# Altium PCB MainBoard.PcbDoc
Units mil, origin at the board's own origin, x right, y up, seen from the top; angles counter-clockwise.
Board outline 2255 x 2075 mil, 2 copper layers (Top Layer, Bottom Layer); 20 components, 27 nets, 97 pads, 4 vias.
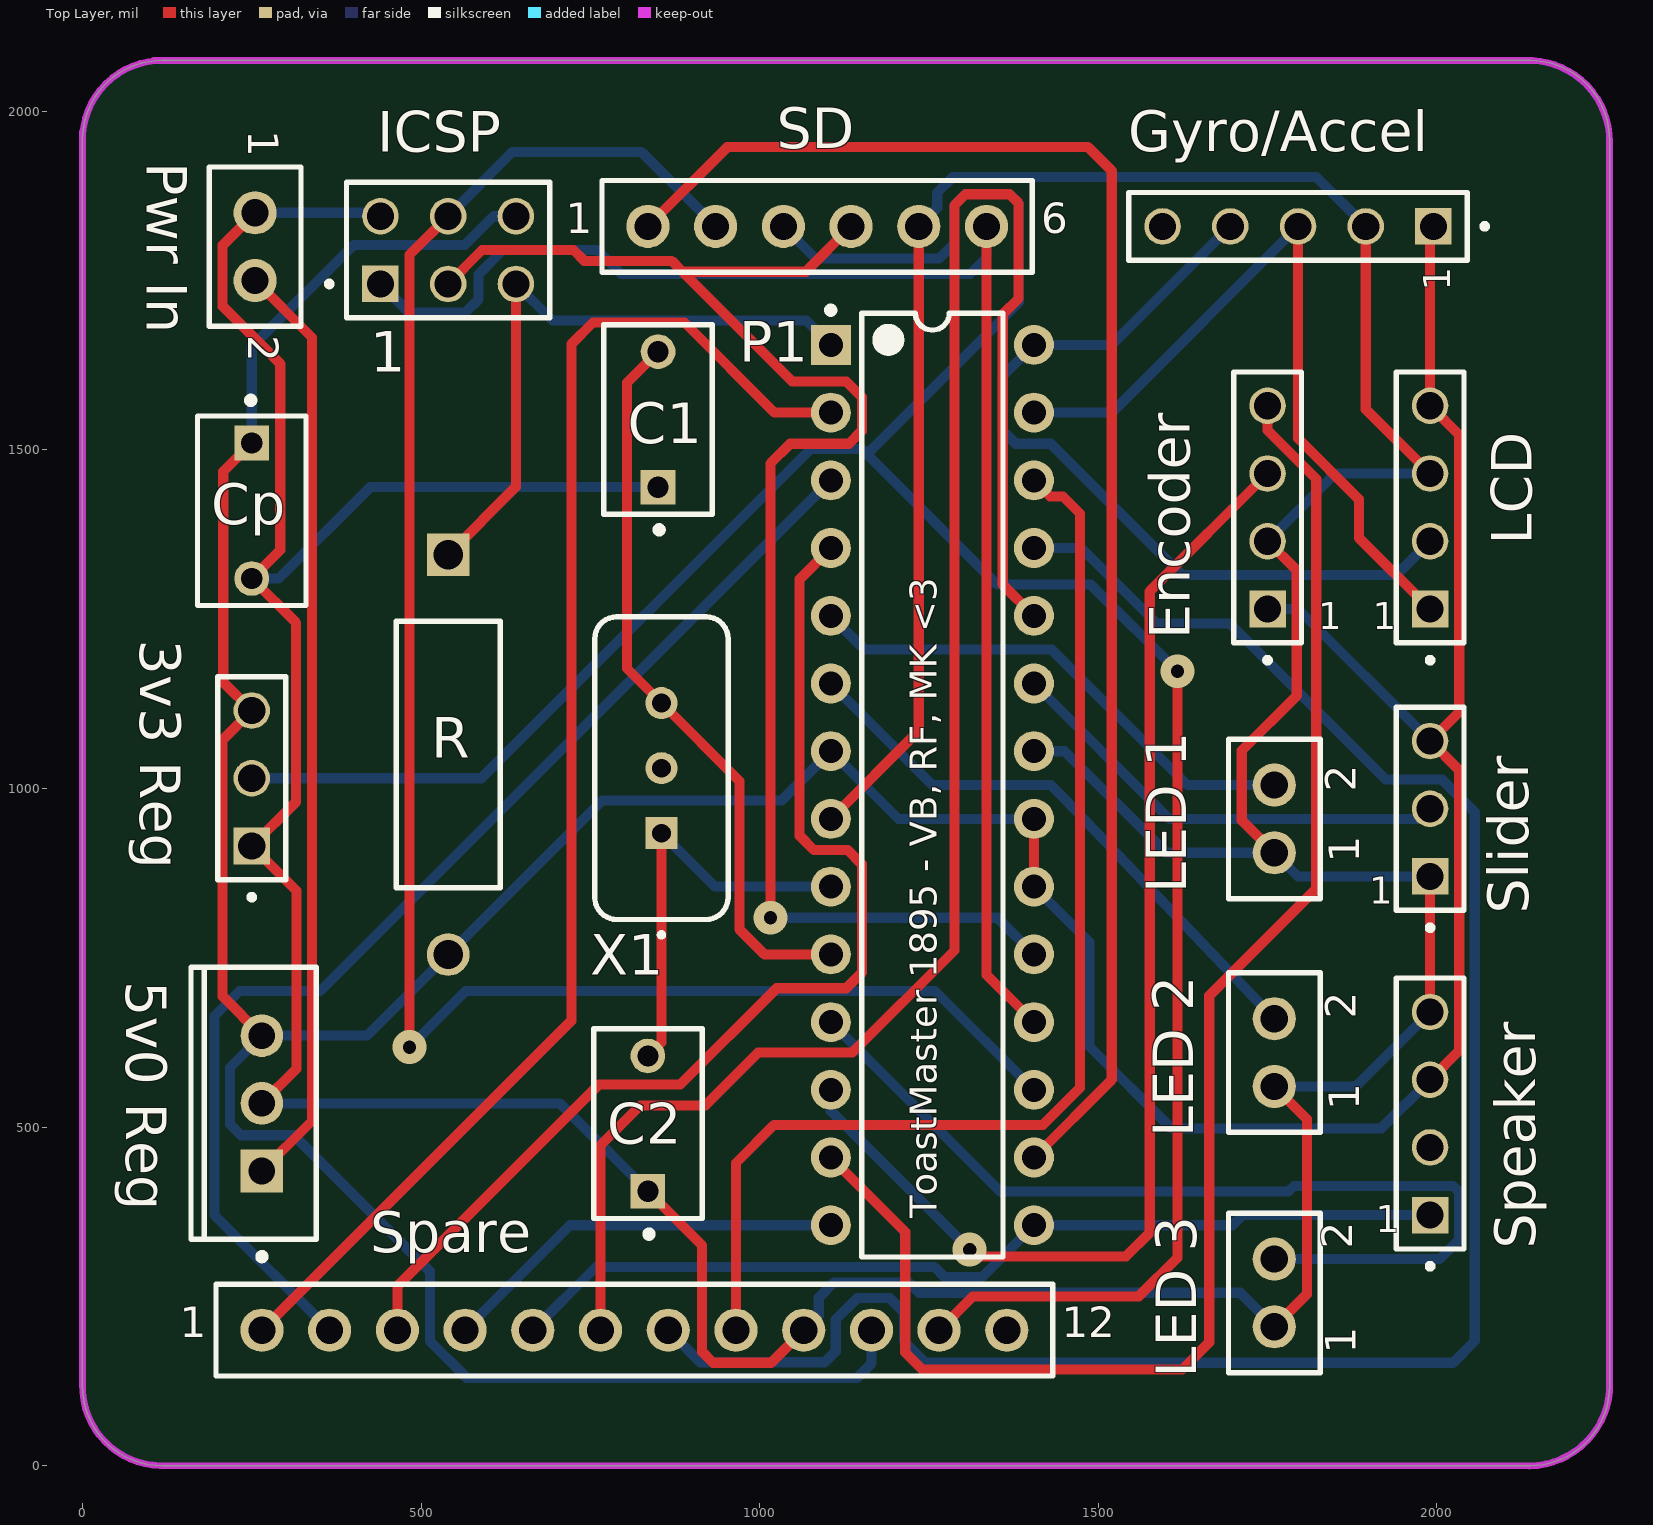
[diagram p0: Top Layer view]
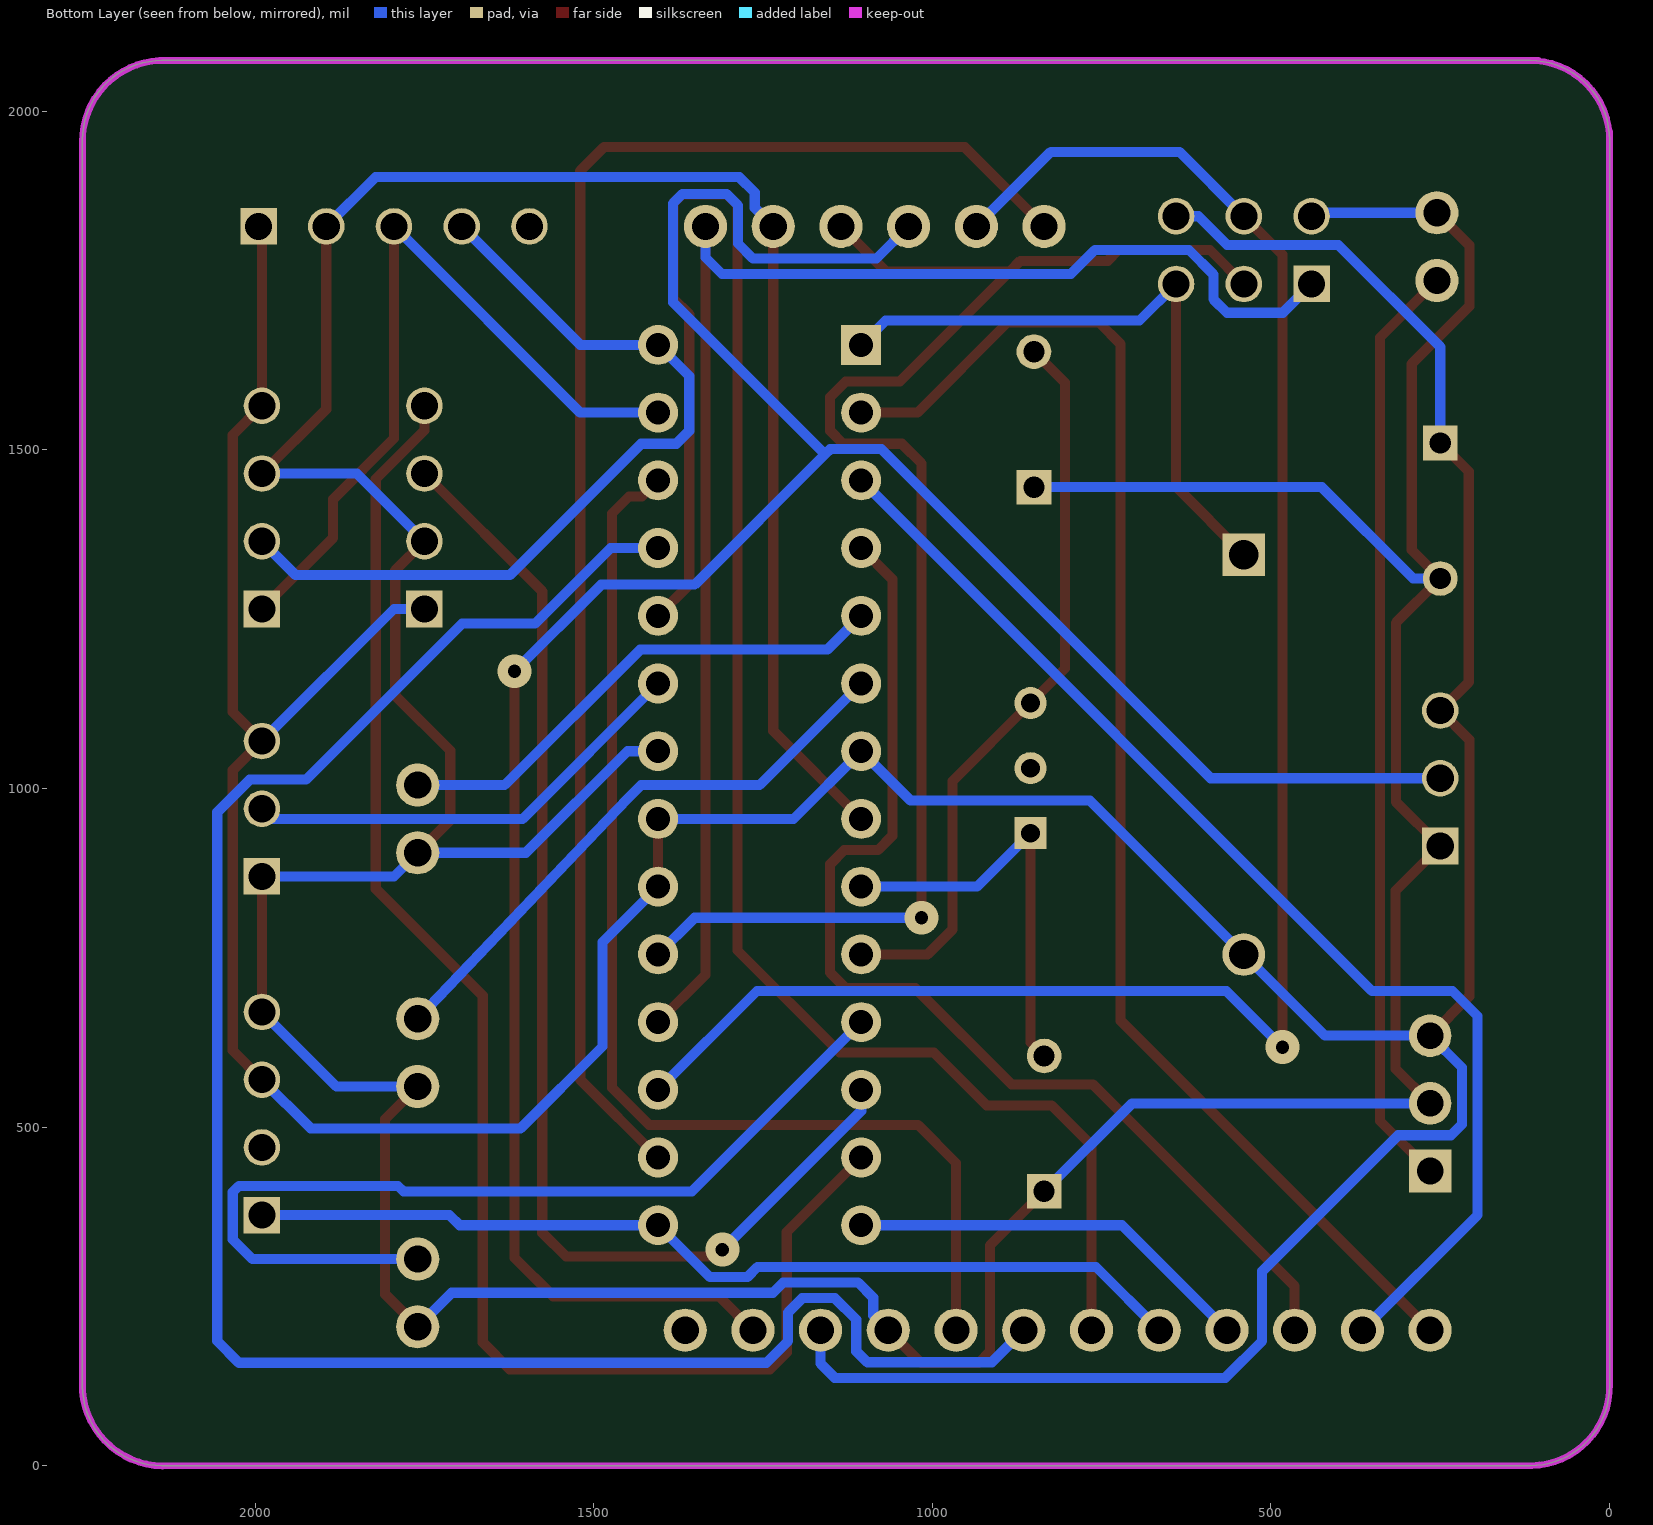
[diagram p1: Bottom Layer view, seen from below]

## Layer stack, top to bottom
Top Solder: solder mask 0.4, Solder Resist, Dk 3.5
Top Layer: signal copper 1.4
Dielectric 1: dielectric 12.6, FR-4, Dk 4.8
Bottom Layer: signal copper 1.4
Bottom Solder: solder mask 0.4, Solder Resist, Dk 3.5

## Board outline
117.43,0 cw(c117.43,117.43) 0,117.43 0,1957.57 cw(c117.43,1957.57) 117.43,2075 2137.57,2075 cw(c2137.57,1957.57) 2255,1957.57 2255,117.43 cw(c2137.57,117.43) 2137.57,0

## Design rules (kind name [scope] priority, off if disabled: settings)
BoardOutlineClearance [All] p1: gap=7.87 ignorepadtopadclearanceinfootprint=FALSE except(15.75: Arc-SplitBarrior Arc-SplitContinuation Track-SplitBarrior Track-SplitContinuation SMDPad-SplitBarrior SMDPad-SplitContinuation THPad-SplitBarrior THPad-SplitContinuation Via-SplitBarrior Via-SplitContinuation Fill-SplitBarrior Fill-SplitContinuation Poly-SplitBarrior Poly-SplitContinuation Region-SplitBarrior Region-SplitContinuation Text-SplitBarrior Text-SplitContinuation)
Clearance "Clearance Bottom Layer" [OnLayer('Bottom Layer')] p1: gap=8 ignorepadtopadclearanceinfootprint=TRUE except(10: Arc-Text Track-Text SMDPad-Text THPad-Text Via-Text Fill-Text Poly-Text Region-Text Text-Text)
Clearance "Clearance Top Layer" [OnLayer('Top Layer')] p2: gap=8 ignorepadtopadclearanceinfootprint=TRUE except(10: Arc-Text Track-Text SMDPad-Text THPad-Text Via-Text Fill-Text Poly-Text Region-Text Text-Text)
Clearance [All] p3: gap=7.87 ignorepadtopadclearanceinfootprint=FALSE except(3.5: Arc-Arc Arc-Track Arc-SMDPad Track-Track Track-SMDPad SMDPad-SMDPad; 5: Arc-Via Track-Via SMDPad-Via THPad-Via Via-Via; 10: Arc-Text Track-Text SMDPad-Text THPad-Text Via-Text Fill-Text Poly-Text Region-Text Text-Text)
HoleSize [All] p1: absolutevalues=TRUE maxlimit=248.03 minlimit=7.87 maxpercent=80.000 minpercent=20.000
MinimumAnnularRing [All] p1: minimumring=3
MinimumSolderMaskSliver [All] p1: minsoldermaskwidth=3.94
PolygonConnect PolygonConnect_1 [All] p1: thpad.connectstyle=Relief thpad.reliefconductorwidth=20 thpad.reliefentries=4 thpad.polygonreliefangle="90 Angle" thpad.airgapwidth=10 smdpad.connectstyle=Relief smdpad.reliefconductorwidth=20 smdpad.reliefentries=4 smdpad.polygonreliefangle="90 Angle" smdpad.airgapwidth=10 via.connectstyle=Direct via.reliefconductorwidth=20 via.reliefentries=4 via.polygonreliefangle="90 Angle" via.airgapwidth=10
RoutingCorners [All] p1: cornerstyle=Round minsetback=100 maxsetback=100
RoutingVias [All] p1: holewidth=19.68 width=50 viastyle="Through Hole" minholewidth=7.87 minwidth=17.72 maxholewidth=39.37 maxwidth=78.74
SilkToSilkClearance [All] p1: silktosilkclearance=3.94
SilkToSolderMaskClearance [IsPad] p1: minsilkscreentomaskgap=3.94 clearancetoexposedcopper=TRUE
SolderMaskExpansion [All] p1: expansion=4 istentingtop=FALSE
Width [All] p1: maxlimit=100 minlimit=3.5 preferedwidth=15
25 further rules are at their usual default settings.

## Components (designator, comment, footprint, x,y, rotation, side; value= is the part's Value field where it differs from the comment)
"3v3 Reg" "TSW-103-07-F-S" SAMTEC_TSW-103-07-F-S 250,1015 r90 top
"5v0 Reg" "LM7805CT" FAIR-TO-220-3 265,535 r180 top
C1 "22pf" KEMT-C330C105M5U5TA 850,1545 r90 top
C2 "22pf" KEMT-C330C105M5U5TA 835,505 r90 top
Cp ".1uF" KEMT-C330C105M5U5TA 250,1410 r270 top (schematic designator C)
Encoder "TSW-104-07-F-S" SAMTEC_TSW-104-07-F-S 1750,1415 r90 top (schematic designator "Rotary Encoder")
Gyro/Accel "TSW-105-07-F-S" SAMTEC_TSW-105-07-F-S 1795,1830 r180 top
ICSP "TSW-103-07-F-D" SAMTEC_TSW-103-07-F-D 540,1795 r0 top (schematic designator "ICSP Header")
LCD "TSW-104-07-F-S" SAMTEC_TSW-104-07-F-S 1990,1415 r90 top
"LED 1" "SAMTEC-TSW-102-07-X-SJ" SAMTEC-TSW-102-07-X-S 1760,955 r90 top
"LED 2" "SAMTEC-TSW-102-07-X-SJ" SAMTEC-TSW-102-07-X-S 1760,610 r90 top
"LED 3" "SAMTEC-TSW-102-07-X-SJ" SAMTEC-TSW-102-07-X-S 1760,255 r90 top
P1 "ATmega328-PU" 28P3 1255,1005 r0 top
"Pwr In" "SAMTEC-TSW-102-07-X-SJ" SAMTEC-TSW-102-07-X-S 255,1800 r270 top (schematic designator "Power In")
R "10k" VISH-A1-2_V2 540,1050 r270 top
SD "SAMTEC-TSW-106-07-X-SJ" SAMTEC-TSW-106-07-X-S 1085,1830 r0 top
Slider "TSW-103-07-F-S" SAMTEC_TSW-103-07-F-S 1990,970 r90 top
Spare "SAMTEC-TSW-112-07-X-SJ" SAMTEC-TSW-112-07-X-S 815,200 r0 top
Speaker "TSW-104-07-F-S" SAMTEC_TSW-104-07-F-S 1990,520 r90 top
X1 "16MHz" ECS-4X-3IL 855,1030 r90 top

## Footprints (in the part's own frame and the unit in brackets; to place one, negate y for a bottom-side part, rotate by r counter-clockwise, add the part's x,y. Pads: shape width x height; smd on the part's side, far side on the other; paste and mask are expansions set on the pad)
28P3 [mm] "28-Pin Plastic Dual In-Line Package (PDIP)"
  rect 1.5x1.5 hole 0.9: 1(-3.81,16.51)
  round 1.5 hole 0.9: 2(-3.81,13.97) 3(-3.81,11.43) 4(-3.81,8.89) 5(-3.81,6.35) 6(-3.81,3.81) 7(-3.81,1.27) 8(-3.81,-1.27) 9(-3.81,-3.81) 10(-3.81,-6.35) 11(-3.81,-8.89) 12(-3.81,-11.43) 13(-3.81,-13.97) 14(-3.81,-16.51) 15(3.81,-16.51) 16(3.81,-13.97) 17(3.81,-11.43) 18(3.81,-8.89) 19(3.81,-6.35) 20(3.81,-3.81) 21(3.81,-1.27) 22(3.81,1.27) 23(3.81,3.81) 24(3.81,6.35) 25(3.81,8.89) 26(3.81,11.43) 27(3.81,13.97) 28(3.81,16.51)
  silkscreen extent -3.93,-17.7 2.65,17.93, body extent -3.6,-17.65 3.6,17.65, height 4.58
ECS-4X-3IL [mm]
  rect 1.2x1.2 hole 0.7: 1(-2.44,0)
  round 1.2 hole 0.7: 2(0,0) 3(2.44,0)
  silkscreen extent -6.34,-2.5 5.68,2.5, body extent -5.68,-2.5 5.68,2.5, height 3.5
FAIR-TO-220-3 [mm] "FM, 3-Leads, Body 10.2x4.7mm, Pitch 2.54mm"
  rect 1.6x1.6 hole 1: 1(0,2.54)
  round 1.6 hole 1: 2(0,0) 3(0,-2.54)
  silkscreen extent -2.04,-5.1 2.66,5.87, body extent -2.04,-5.1 2.66,5.1, height 18.95
KEMT-C330C105M5U5TA [mm] "THD, 2-Leads, Body 7.11x4.07mm"
  rect 1.3x1.3 hole 0.8: 1(-2.54,0)
  round 1.3 hole 0.8: 2(2.54,0)
  silkscreen extent -4.27,-2.03 3.55,2.03, body extent -3.55,-2.03 3.55,2.03, height 9.14
SAMTEC-TSW-102-07-X-S [mm]
  round 1.62 hole 1.02: 1(-1.27,0) 2(1.27,0)
  silkscreen extent -2.99,-1.72 2.99,1.72
SAMTEC-TSW-106-07-X-S [mm]
  round 1.62 hole 1.02: 1(-6.35,0) 2(-3.81,0) 3(-1.27,0) 4(1.27,0) 5(3.81,0) 6(6.35,0)
  silkscreen extent -8.07,-1.72 8.07,1.72
SAMTEC-TSW-112-07-X-S [mm]
  round 1.62 hole 1.02: 1(-13.97,0) 2(-11.43,0) 3(-8.89,0) 4(-6.35,0) 5(-3.81,0) 6(-1.27,0) 7(1.27,0) 8(3.81,0) 9(6.35,0) 10(8.89,0) 11(11.43,0) 12(13.97,0)
  silkscreen extent -15.69,-1.72 15.69,1.72
SAMTEC_TSW-103-07-F-D [mm]
  rect 1.37x1.37 hole 1.02: 01(-2.54,-1.27)
  round 1.37 hole 1.02: 02(-2.54,1.27) 03(0,-1.27) 04(0,1.27) 05(2.54,-1.27) 06(2.54,1.27)
  silkscreen extent -4.56,-2.54 3.81,2.54
SAMTEC_TSW-103-07-F-S [mm]
  rect 1.37x1.37 hole 1.02: 01(-2.54,0)
  round 1.37 hole 1.02: 02(0,0) 03(2.54,0)
  silkscreen extent -4.56,-1.27 3.81,1.27
SAMTEC_TSW-104-07-F-S [mm]
  rect 1.37x1.37 hole 1.02: 01(-3.81,0)
  round 1.37 hole 1.02: 02(-1.27,0) 03(1.27,0) 04(3.81,0)
  silkscreen extent -5.83,-1.27 5.08,1.27
SAMTEC_TSW-105-07-F-S [mm]
  rect 1.37x1.37 hole 1.02: 01(-5.08,0)
  round 1.37 hole 1.02: 02(-2.54,0) 03(0,0) 04(2.54,0) 05(5.08,0)
  silkscreen extent -7.1,-1.27 6.35,1.27
VISH-A1-2_V2 [mm] "Through Hole, 2-Leads, Dia 3.9mm, Body Length 10mm, Pin Spacing 15mm"
  rect 1.6x1.6 hole 1.1: 1(-7.5,0)
  round 1.6 hole 1.1: 2(7.5,0)
  silkscreen extent -5,-1.95 5,1.95, body extent -7.91,-1.95 7.92,1.95, height 3.88

## Part data
"3v3 Reg" Encoder Gyro/Accel ICSP LCD Slider Speaker: Package=None, Availability=Unavailable, MF=Samtec, Price=None
  "3v3 Reg" Slider: MP=TSW-103-07-F-S
  Encoder LCD Speaker: MP=TSW-104-07-F-S
  Gyro/Accel: MP=TSW-105-07-F-S
  ICSP: MP=TSW-103-07-F-D
"5v0 Reg": library part CMP-2000-04938-1, "Positive Voltage Regulator, 5 V, 1 A, -40 to 125 degC, 3-Pin TO-220, RoHS, Tube", Manufacturer=FairchildSemiconductor, Maximum Input Voltage=35V, Maximum Output Current=2.2(Typ)A, Maximum Quiescent Current=8mA, Operating Temperature=-40to125degC, Output Voltage=5V, Package=3TO-220AB, Package Description="3-Pin Through Hole Device, Body 10 x 4.5 mm, Pitch 2.54 mm", Package Reference=TO-220, Typical Dropout Voltage @ Current=2@1AV, Accuracy=±4%, Category=LinearRegulator, Datasheet URL=https://datasheet.ciiva.com/26904/lm7805ct-26904988.pdf, Datasheet Version=Aug-12, Line Regulation=100mV, Load Regulation=100mV, Manufacturer URL=https://www.fairchildsemi.com/, Mounting=ThroughHole, Number of Outputs=1, Output Type=Fixed, Package URL=https://www.fairchildsemi.com/package-drawings/TO/TO220B03.pdf, Packaging=Rail/Tube, Polarity=Positive, Rad Hard=No, Type=Linear
C1 C2 Cp: library part CMP-2000-06056-1, "Ceramic Capacitor, 1 uF, +/- 20%, 50 V, -10 to 85 degC, 2-Pin THD, RoHS, Bulk", Capacitance=1µF, Manufacturer=Kemet, Operating Temperature=10°C~85°C, Package / Case=Radial, Package Description="2-Pin Through Hole Device, Body 7.11 x 4.07 mm", Package Reference=C330C105M5U5TA, Ratings=-, Standard Package=250, Temperature Coefficient=Z5U, Tolerance=±20%, Voltage - Rated=50V, Applications=GeneralPurpose, Catalog Drawings=C330(std), Category=Capacitors, Datasheet URL=http://www.kemet.com/Lists/ProductCatalog/Attachments/599/KEM_C1051_GOLDMAX_Z5U.pdf, Datasheet Version=12/2015, Family=CeramicCapacitors, Features=-, Height - Seated (Max)="0.360\"(9.14mm)", Lead Spacing="0.200\"(5.08mm)", Lead Style=Straight, Manufacturer URL=http://www.kemet.com/, Mounting Technology=ThroughHole, Mounting Type=ThroughHole, Online Catalog=GoldenMax™Series, Other Names=399-4390, Packaging=Bulk, PCN Design/Specification=C3yySeriesGoldenMaxLeadConfiguration02/Feb/2015, Product Training Modules=CapacitorBasics-TypicalUsesforCapacitors, Series=GoldenMax™, Size / Dimension="0.300\"Lx0.150\"W(7.62mmx3.81mm)", Thickness (Max)=-
P1: library part CMP-0095-00015-2, "8-bit AVR Microcontroller, 32KB Flash, 1KB EEPROM, 2KB SRAM, 28-pin PDIP, Industrial Grade (-40°C to 85°C)", ComponentLink1Description="Manufacturer URL", ComponentLink1URL=http://www.atmel.com/, ComponentLink2Description="ATmega48A/48PA/88A/88PA/168A/168PA/328/328P Datasheet", ComponentLink2URL=http://www.atmel.com/dyn/resources/prod_documents/8271.pdf, ComponentLink3Description="ATmega48A/48PA/88A/88PA/168A/168PA/328/328P Summary", ComponentLink3URL=http://www.atmel.com/dyn/resources/prod_documents/8271S.pdf, DatasheetVersion="revD, May-2011", PackageDescription="28-lead (0.300\"/7.62mm Wide) Plastic Dual Inline Package (PDIP)", PackageReference=28P3, PackageVersion="revB, Sep-2001", RevisionNote="DatasheetVersion updated. URLs added."
R: library part CMP-1240-00001-1, "Power Metal Film Leaded Resistor, 62 KOhm +/-5%, 2 W, 2-Pin THD, RoHS, Ammo Pack", Manufacturer="Vishay Semiconductor", PartNumber=PR02000206202JA100, Power="2 W", Resistance="62 KOhm", Temperature Coefficient="+/-250 ppm/degC", Tolerance=+/-5%, ComponentLink1Description="Manufacturer URL", ComponentLink1URL=http://www.vishay.com/, ComponentLink2Description=Datasheet, ComponentLink2URL=http://www.vishay.com/docs/28729/28729.pdf, ComponentLink3Description="Package Specification", ComponentLink3URL=http://www.vishay.com/docs/28729/28729.pdf, DatasheetVersion=Jun-13, Mounting Technology="Through Hole", PackageDescription="2-Pin Axial Lead, Body 10 x 3.9 mm", Packing="Ammo Pack", RoHS=TRUE
X1: library part CMP-1669-00002-2, "CRYSTAL 8.00 MHZ 20PF 49US", Manufacturer=ECS, PartNumber=ECS-80-20-4X, ComponentLink1Description=Datasheet, ComponentLink1URL=http://www.ecsxtal.com/store/pdf/hc-49usx.pdf, PackageReference=4X-3IL

## Via types
v1: diameter 50, hole 19.68, Top Layer to Bottom Layer, 4 vias

## Nets (pads, with @x,y where several pads share a name; then routed paths per layer and width w, separated by ;. In a path a pad name is that pad's centre, name@x,y a point inside that pad or via, vN(x,y) a via of type N, cw(c..) or ccw(c..) an arc to the next point about the centre after c; other vN are vias at no path point)
3v3: "3v3 Reg.02" SD.3 Spare.11 | length 3876
  Top Layer w15: Spare.11 1315,250 1560,250 1617,307 v1(1617,1173)
  Bottom Layer w15: 250,1015 589,1015 1075,1501 1151,1501 1158.5,1493.5 ; SD.3 1082.39,1782.61 1265,1782.61 1287,1804.61 1287,1861 1304,1878 1369,1878 1383,1864 1383,1718 1158.5,1493.5 ; v1(1617,1173) 1489,1301 1351,1301 1158.5,1493.5
A0: P1.23 Slider.02 | length 682.8
  Bottom Layer w15: P1.23 1605,955 1990,955 Slider.02
A1: P1.24 Spare.6 | length 2760
  Top Layer w15: Spare.6 765,473 824,532 920,532 997.97,609.97 1136.97,609.97 1287.61,760.61 1287.61,1861 1304,1877.39 1369,1877.39 1382.39,1864 1382.39,1723.39 1359,1700 1359,1301 P1.24
A2: P1.25 Spare.7 | length 2948.4
  Bottom Layer w15: Spare.7 912.39,152.61 1096,152.61 1112.39,169 1112.39,215.78 1144,247.39 1192,247.39 1213,226.39 1213,184 1245,152 2024,152 2056,184 2056,965 2008,1013 1925,1013 1694.65,1243.35 1586.65,1243.35 1475,1355 P1.25
A3: P1.26 Spare.8 | length 1737.3
  Top Layer w15: Spare.8 965,447 1021,503 1418,503 1473.03,558.03 1473.03,1405.97 1448,1431 1429,1431 P1.26
CS: P1.16 SD.1 | length 2252.6
  Top Layer w15: SD.1 952,1947 1485,1947 1520,1912 1520,570 P1.16
D0: P1.2 Spare.1 | length 2096.6
  Top Layer w15: Spare.1 722,657 722,1656 754,1688 889,1688 1022,1555 P1.2
D1: P1.3 Spare.2 | length 1772.1
  Bottom Layer w15: Spare.2 195,370 195,664 232,701 351,701 P1.3
D2: P1.4 Spare.3 | length 1656.2
  Top Layer w15: Spare.3 465,265 763,563 883,563 1025,705 1128,705 1151,728 1151,888 1130,909 1080,909 1059,930 1059,1309 P1.4
D3: "LED 1.2" P1.5 | length 758.6
  Bottom Layer w15: P1.5 1155,1205 1431.53,1205 1631.53,1005 1760,1005
D4: "LED 2.2" P1.6 | length 864.6
  Bottom Layer w15: P1.6 1255,1005 1430,1005 1450.03,984.97 1760,660
D5: "LED 3.2" P1.11 | length 1393.6
  Bottom Layer w15: P1.11 1355,405 1781,405 1789,413 2024,413 2033,404 2033,334 2004,305 1760,305
D6: Encoder.03 P1.12 | length 1798.6
  Top Layer w15: v1(1310,319) 1320,309 1541,309 1576,344 1576,1291 Encoder.03
  Bottom Layer w15: P1.12 1105,524 v1(1310,319)
D7: Encoder.04 P1.13 | length 2287.8
  Top Layer w15: P1.13 1215,345 1215,167 1240,142 1624,142 1664,182 1664,694 1822,852 1822,1457 1750,1529 Encoder.04
D8: P1.14 Spare.4 | length 604.2
  Bottom Layer w15: Spare.4 720,355 P1.14
D9: P1.15 Spare.5 Speaker.01 | length 1407.9
  Bottom Layer w15: Spare.5 758.39,293.39 1258.39,293.39 1273.41,278.37 1328.37,278.37 P1.15 1698,355 1713,370 Speaker.01
GND: "3v3 Reg.01" "5v0 Reg.2" "LED 1.1" "LED 2.1" "LED 3.1" "Pwr In.1" C1.1 C2.1 Cp.2 Encoder.02 Gyro/Accel.02 ICSP.02 LCD.03 P1.8 P1.22 SD.5 Slider.01 Spare.9 Speaker.04 | length 8581.4
  Top Layer w15: 255,1850 207,1802 207,1712 292,1627 292,1352 Cp.2 315.47,1244.53 315.47,980.47 250,915 316,849 316,586 265,535 ; C2.1 915,325 915,168 931,152 1017,152 Spare.9 ; P1.8 1235,1085 SD.5 ; Encoder.02 1793,1322 1793,1137 1712,1056 1712,953 1760,905 ; 1760,205 1808,253 1808,512 1760,560 ; Gyro/Accel.02 1895,1560 LCD.03 ; Speaker.04 Slider.01
  Bottom Layer w15: Cp.2 290,1310 425,1445 C1.1 ; 255,1850 435,1850 ICSP.02 ; 265,535 705,535 C2.1 ; Spare.9 1087.16,222.16 1087.16,248 1109.55,270.39 1220.37,270.39 1235.39,255.37 1709.63,255.37 1760,205 ; SD.5 1262.3,1857.3 1262.3,1880 1285,1902.7 1822.3,1902.7 Gyro/Accel.02 ; P1.22 1450.24,1055 1600.24,905 1760,905 1795,870 Slider.01 ; Encoder.02 1850,1465 LCD.03 ; 1760,560 1880,560 Speaker.04
"Net5v0 Reg_1": "5v0 Reg.1" "Pwr In.2" | length 1380.4
  Top Layer w15: 255,1750 339,1666 339,509 265,435
NetC1_2: C1.2 P1.10 X1.3 | length 1091.1
  Top Layer w15: C1.2 804,1599 804,1177.06 X1.3 970,1011.06 970,792 1007,755 P1.10
NetC2_2: C2.2 P1.9 X1.1 | length 619.9
  Top Layer w15: C2.2 855,625 X1.1
  Bottom Layer w15: X1.1 933.94,855 P1.9
NetGyro/Accel_03: Gyro/Accel.03 LCD.01 P1.27 | length 1149.7
  Top Layer w15: Gyro/Accel.03 1795,1517 1884.83,1427.17 1884.83,1370.17 LCD.01
  Bottom Layer w15: P1.27 1520,1555 Gyro/Accel.03
NetGyro/Accel_04: Gyro/Accel.04 LCD.02 P1.28 | length 1248.5
  Bottom Layer w15: Gyro/Accel.04 1520,1655 P1.28 1359,1609 1359,1528 1378,1509 1430,1509 1624,1315 1940,1315 LCD.02
"NetICSP Header_01": ICSP.01 P1.18 SD.6 | length 2247
  Top Layer w15: SD.6 1335,725 P1.18
  Bottom Layer w15: ICSP.01 482.47,1702.53 565,1702.53 585,1722.53 585,1759.06 620.94,1795 760,1795 795.39,1759.61 1310.61,1759.61 1335,1784 SD.6
"NetICSP Header_03": ICSP.03 P1.19 SD.4 | length 2285.6
  Top Layer w15: ICSP.03 590,1795 725,1795 741,1779 870,1779 886,1763 ; v1(1016,809) 1016,1480 1045,1509 1132,1509 1151,1528 1151,1578 1128,1601 1048,1601 886,1763 ; SD.4 1068,1763 886,1763
  Bottom Layer w15: v1(1016,809) 1351,809 P1.19
"NetICSP Header_04": ICSP.04 P1.17 SD.2 | length 2747.4
  Top Layer w15: v1(483,618) 483,1788 ICSP.04
  Bottom Layer w15: v1(483,618) 566,701 1259,701 P1.17 ; ICSP.04 635,1940 825,1940 SD.2
"NetICSP Header_05": ICSP.05 P1.1 R.1 | length 943.4
  Top Layer w15: R.1 640,1445.28 ICSP.05
  Bottom Layer w15: ICSP.05 694,1691 1069,1691 P1.1
VCC: "3v3 Reg.03" "5v0 Reg.3" Cp.1 Encoder.01 Gyro/Accel.01 ICSP.06 LCD.04 P1.7 P1.20 P1.21 R.2 Slider.03 Spare.10 Speaker.03 | length 6896.9
  Top Layer w15: Cp.1 208,1468 208,1157 250,1115 207,1072 207,693 265,635 ; P1.20 P1.21 ; Speaker.03 2033,613 2033,1027 Slider.03 2033,1113 2033,1522 LCD.04 1990,1825 Gyro/Accel.01
  Bottom Layer w15: Cp.1 250,1652 400.53,1802.53 564.53,1802.53 607,1845 ICSP.06 ; Spare.10 1165,150.61 1144,129.61 567.39,129.61 513,184 513,287 312,488 234,488 218,504 218,588 265,635 420.28,635 R.2 767.28,982 1032,982 P1.7 1205,955 P1.21 ; P1.20 1487,773 1487,619 1608,498 1918,498 Speaker.03 ; Encoder.01 1795,1265 Slider.03
pads on no net: Gyro/Accel.05 Spare.12 Speaker.02 X1.2

## Keep-outs
Keep-Out Layer:
  lines w10: 0,1970 0,120 ccw(c117.5,117.5) 115,0 2145,0 ; 105,2075 180,2075 ; 2125,0 ccw(c2135,120) 2255,110 2255,1955 ccw(c2135.3,1955.42) 2130,2075 119.99,2074.99 ccw(c117.49,1957.51) 0.01,1955.01 ; 0,1955 0.01,1955.01

## Silkscreen, mask and mechanical layers (free items; w line width, h text height)
Top Overlay:
  text "1" at 2020,1735 h40 r90
  text "1" at 425,1615 h60
  text "1" at 1825,1235 h40
  text "1" at 1905,1235 h40
  text "1" at 1900,830 h40
  text "ToastMaster 1895 - VB, RF, MK <3" at 1261.67,365 h40 r90
  text "1" at 1910,345 h40
Mechanical 1:
  the board outline again, w10

## Text inside footprints (layer, text, board x,y; h text height)
"LED 1": Top Overlay "1" at 1900,890 h77.5 r90; Top Overlay "2" at 1895,995 h77.5 r90; Mechanical 40 "2.540" at 1765,584.02 h15.5 r90; Mechanical 40 "2.540" at 1635,801.5 h15.5 r90; Mechanical 40 "5.080" at 1932.52,929.02 h15.5 r90; Mechanical 16 "1" at 1785,783.35 h77.5 r90; Mechanical 16 "2" at 1785,1086.14 h77.5 r90
"LED 2": Top Overlay "1" at 1900,525 h77.5 r90; Top Overlay "2" at 1895,660 h77.5 r90; Mechanical 40 "2.540" at 1765,239.02 h15.5 r90; Mechanical 40 "2.540" at 1635,456.5 h15.5 r90; Mechanical 40 "5.080" at 1932.52,584.02 h15.5 r90; Mechanical 16 "1" at 1785,438.35 h77.5 r90; Mechanical 16 "2" at 1790,740 h77.5 r90
"LED 3": Top Overlay "1" at 1895,165 h77.5 r90; Top Overlay "2" at 1890,320 h77.5 r90; Mechanical 40 "2.540" at 1765,-115.98 h15.5 r90; Mechanical 40 "2.540" at 1635,101.5 h15.5 r90; Mechanical 40 "5.080" at 1932.52,229.02 h15.5 r90; Mechanical 16 "1" at 1785,83.35 h77.5 r90; Mechanical 16 "2" at 1785,386.14 h77.5 r90
"Pwr In": Top Overlay "1" at 230,1971.65 h77.5 r270; Top Overlay "2" at 230,1668.86 h77.5 r270; Mechanical 40 "2.540" at 250,2170.98 h15.5 r270; Mechanical 40 "2.540" at 380,1953.5 h15.5 r270; Mechanical 40 "5.080" at 82.48,1825.98 h15.5 r270; Mechanical 16 "1" at 230,1971.65 h77.5 r270; Mechanical 16 "2" at 230,1668.86 h77.5 r270
SD: Top Overlay "1" at 713.35,1805 h77.5; Top Overlay "6" at 1416.14,1805 h77.5; Mechanical 40 "2.540" at 514.02,1825 h15.5; Mechanical 40 "2.540" at 734.02,1897.48 h15.5; Mechanical 40 "15.240" at 1053.5,1657.48 h15.5; Mechanical 40 "12.700" at 1053.5,1955 h15.5; Mechanical 16 "1" at 713.35,1805 h77.5; Mechanical 16 "6" at 1416.14,1805 h77.5
Spare: Top Overlay "1" at 143.35,175 h77.5; Top Overlay "12" at 1446.14,175 h77.5; Mechanical 40 "2.540" at -55.98,195 h15.5; Mechanical 40 "2.540" at 164.02,267.48 h15.5; Mechanical 40 "30.480" at 783.5,27.48 h15.5; Mechanical 40 "27.940" at 783.5,325 h15.5; Mechanical 16 "1" at 143.35,175 h77.5; Mechanical 16 "12" at 1446.14,175 h77.5